# EAGLE board PRA_30_5_23@2 (EAGLE 6.3)
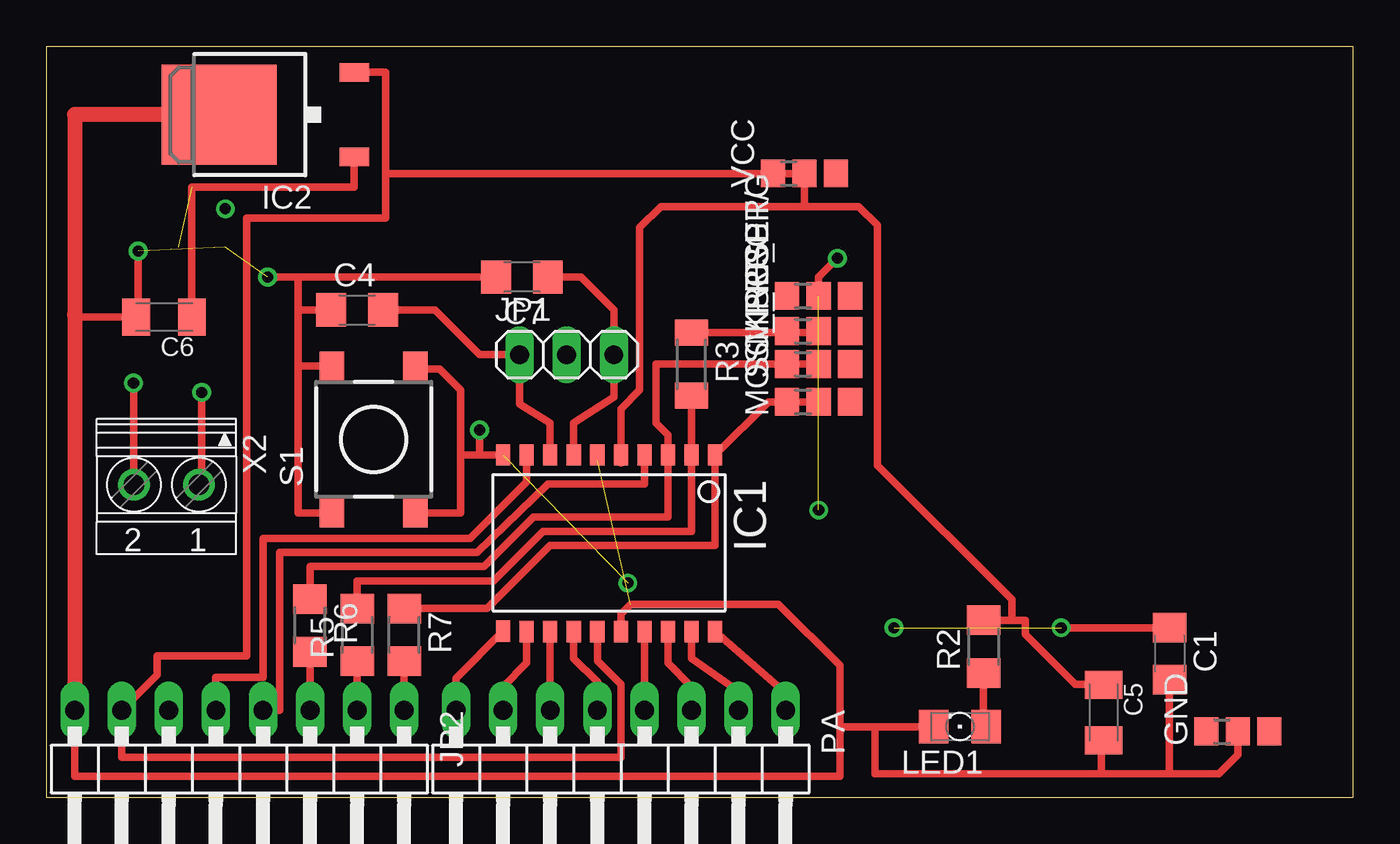
[diagram p0: board, top side]
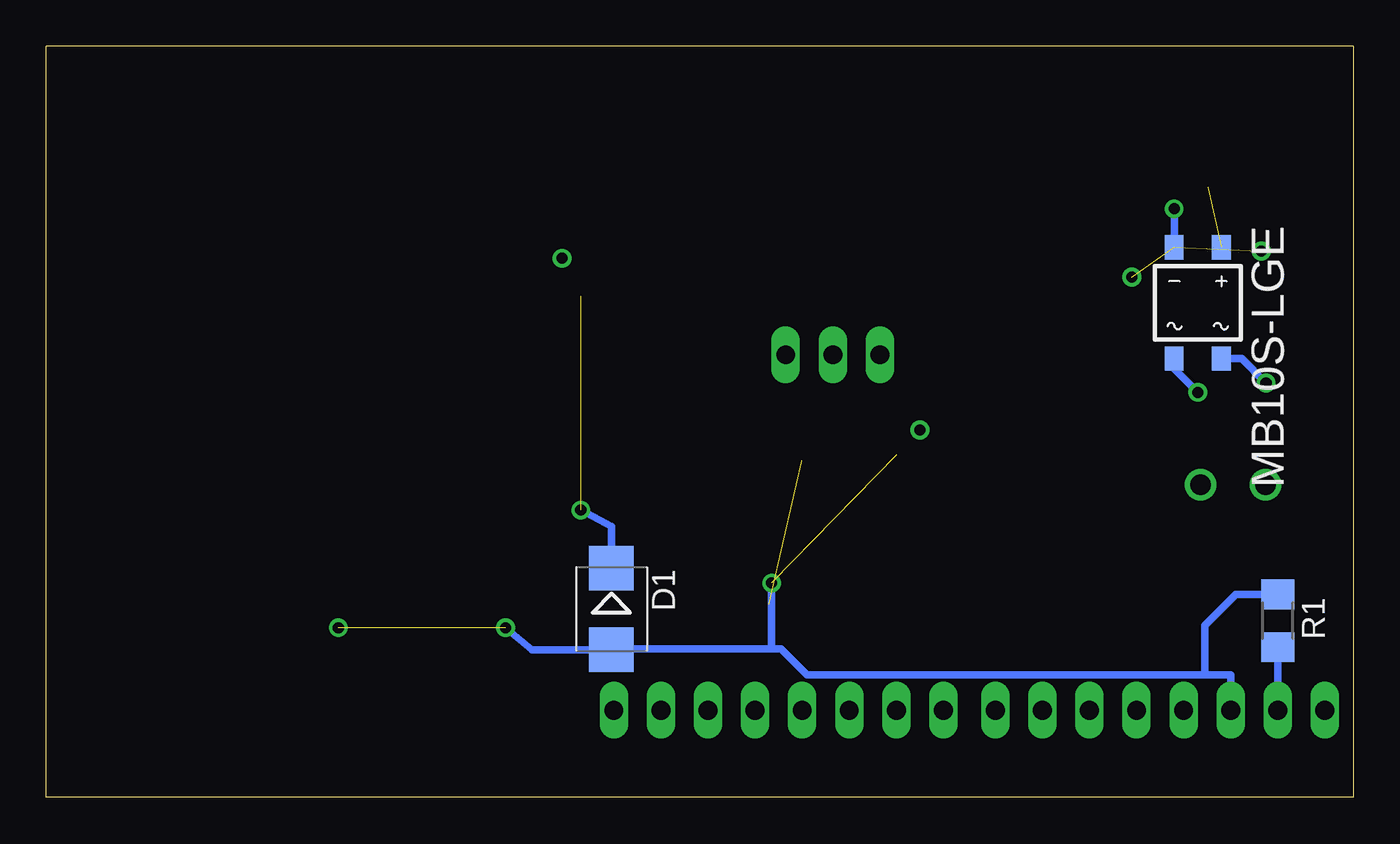
[diagram p1: board, bottom side, seen from below]

Size 70.48 x 40.51 mm. Coordinates in mm from the lower left corner, seen from the top.
Outline: 0,0 70.48,0 70.48,40.51 0,40.51 0,0
Copper layers (1*16): Top 0.035mm / dielectric 1.5mm / Bottom 0.035mm
Design rules "default": minimum track width 10mil, minimum drill 24mil, track to track 8mil, track to pad 8mil, pad to pad 8mil, via to via 8mil, smd to smd 8mil, copper to edge 40mil, drill to drill 8mil, minimum pad ring 10mil, minimum via ring 8mil, stop-mask expansion 4mil, vias tented up to drill 0mil, thermal gap 10mil

## Footprints (pad centres in the part's own frame; a part is rotated, then mirrored left to right if it is on the bottom)
C1206 = smd 1.6 x 1.8: 1 -1.4,0; 2 1.4,0
C1206K = smd 1.5 x 2: 1 -1.5,0; 2 1.5,0
SMB = smd 2.4 x 2.4: A 2.2,0; C -2.2,0
A0R-JMP = smd 1.5 x 1.3: 1 0,1.7; 2 0,0; 3 0,-1.7
SO20L = smd 0.762 x 1.143: 1 -5.08,-5.131; 2 -3.81,-5.131; 3 -2.54,-5.131; 4 -1.27,-5.131; 5 0,-5.131; 6 1.27,-5.131; 7 2.54,-5.131; 8 3.81,-5.131; 9 5.08,-5.131; 10 6.35,-5.131; 11 6.35,4.369; 12 5.08,4.394; 13 3.81,4.394; 14 2.54,4.394; 15 1.27,4.394; 16 0,4.394; 17 -1.27,4.394; 18 -2.54,4.394; 19 -3.81,4.394; 20 -5.08,4.394
TO252 = smd 1 x 1.6: 1 -2.28,-4.8; 2 2.28,-4.8 | smd 5.4 x 6.2: 3 0,2.5
1X03 = drill 1.016 long: 1 -2.54,0; 2 0,0; 3 2.54,0
1X08/90 = drill 1.016 long: 1 -8.89,-3.81; 2 -6.35,-3.81; 3 -3.81,-3.81; 4 -1.27,-3.81; 5 1.27,-3.81; 6 3.81,-3.81; 7 6.35,-3.81; 8 8.89,-3.81
1206 = smd 1.6 x 1.803: A -1.422,0; C 1.422,0
MBS = smd 1 x 1.3: + -1.27,-3; - 1.27,-3; AC1 -1.27,3; AC2 1.27,3
R1206 = smd 1.6 x 1.803: 1 -1.422,0; 2 1.422,0
M1406 = smd 1.4 x 1.8: 1 -1.7,0; 2 1.7,0
DTSM-6 = smd 1.55 x 1.3: 1 -3.975,2.25; 2 3.975,2.25; 3 -3.975,-2.25; 4 3.975,-2.25
1751248 = drill 1.1 pad 1.7: 1 -1.75,-0.1; 2 1.75,-0.1

## Placement (x,y rotation side)
C1  100n  [C1206]  60.58,7.75 270 top
C4  33p  [C1206]  16.76,26.29 0 top
C5  10uTantal  [C1206K]  57.02,4.57 270 top
C6  10u/20VTantal  [C1206K]  6.35,25.91 180 top
C7  33p  [C1206]  25.65,28.07 180 top
D1  4148  [SMB]  40.01,10.16 270 bottom
GND  0R-JUMPA  [A0R-JMP]  64.26,3.56 90 top
IC1  TINY26LS  [SO20L]  30.99,13.34 180 top
IC2  LM2936DT-5.0  [TO252]  11.81,36.83 90 top
JP1  [1X03]  28.07,23.88 0 top
JP2  [1X08/90]  10.41,0.89 180 top
LED1  [1206]  49.28,3.81 180 top
MB10S-LGE  B10S  [MBS]  8.38,26.67 180 bottom
MISO_PRG  0R-JUMPA  [A0R-JMP]  41.66,25.15 90 top
MOSI_PRG  0R-JUMPA  [A0R-JMP]  41.66,21.34 90 top
PA  [1X08/90]  30.99,0.89 180 top
R1  10k  [R1206]  4.06,9.53 270 bottom
R2  1k  [R1206]  50.55,8.13 90 top
R3  0R  [M1406]  34.8,23.37 270 top
R5  4k7  [R1206]  16.76,8.76 90 top
R6  4k7  [R1206]  14.22,9.27 270 top
R7  4k7  [R1206]  19.3,8.76 270 top
RESET/  0R-JUMPA  [A0R-JMP]  41.66,27.05 90 top
S1  DTSM-6  [DTSM-6]  17.65,19.3 90 top
SCK_PRG  0R-JUMPA  [A0R-JMP]  41.66,23.37 90 top
VCC  0R-JUMPA  [A0R-JMP]  40.89,33.66 90 top
X2  1751248  [1751248]  6.48,16.76 180 top

## Library data of the parts
C1 C4-C7 R1-R3 R5-R7 = rcl
D1 = diode
GND MISO_PRG MOSI_PRG RESET/ SCK_PRG VCC = jump-0r-smd
IC1 = atmel; MPN: ATTINY26L-8SU; OC_FARNELL: 9171665; OC_NEWARK: 01M6921
IC2 = national-semiconductor; MF: NATIONAL SEMICONDUCTOR; MPN: LM2936DT-5.0/NOPB; OC_FARNELL: 1286864; OC_NEWARK: 41K4501
JP1 JP2 PA = pinhead
LED1 = led
MB10S-LGE = rectifier
S1 = switch-tact
X2 = con-phoenix-350; OC_FARNELL: unknown; OC_NEWARK: unknown

## Nets
GND: C1.2 C4.1 C5.2 C6.2 C7.2 GND.2 IC1.6 IC1.16 IC2.3 JP2.8 LED1.C MB10S-LGE.- S1.1 S1.2
MISO: JP2.2 R5.1
MISO_JUMP_RES: MISO_PRG.2 R3.1
MISO_PRG: IC1.2 R3.2 R5.2
MOSI: JP2.1 R7.2
MOSI_PRG: IC1.1 MOSI_PRG.2 R7.1
N$15: C4.2 IC1.8 JP1.1
N$16: C7.1 IC1.7 JP1.3
N$17: MB10S-LGE.AC2 X2.1
N$29: MB10S-LGE.AC1 X2.2
N$30: LED1.A R2.1
PA0: IC1.20 PA.1
PA1: IC1.19 PA.2
PA2: IC1.18 PA.3
PA3: IC1.17 PA.4
PA4: IC1.14 PA.5
PA5: IC1.13 PA.6
PA6: IC1.12 PA.7
PA7: IC1.11 PA.8
PB3: IC1.4 JP2.4
PB6: IC1.9 JP2.5
PB7: C1.1 D1.A IC1.10 JP2.6 R1.1 S1.3 S1.4
RESET: D1.C RESET/.2
SCK: JP2.3 R6.2
SCK_PRG: IC1.3 R6.1 SCK_PRG.2
VCC: C5.1 IC1.5 IC1.15 IC2.2 JP2.7 R1.2 R2.2 VCC.2
VIN_PLUS: C6.1 IC2.1 MB10S-LGE.+

## Tracks (layer width: path | path; a pad name or v marks a point on that pad's centre or on a via)
GND  (via drill 0.6)  (3 unrouted)
  Top 0.254: IC1.6 29.72,18.16
  Top 0.406: 1.52,26.04 1.52,25.91 C6.2 4.95,25.91 v4.95,29.46 | IC1.16 30.99,9.91 31.5,10.41 39.5,10.41 42.8,7.11 42.8,3.81 | JP2.8 1.52,1.14 42.8,1.14 42.8,3.81 | 44.7,3.81 42.8,3.81 | S1.1 13.59,15.33 13.59,23.28 | 13.59,23.28 13.59,26.29 | 13.59,26.29 13.59,28.07 | S1.2 13.59,23.28 | LED1.C 44.7,3.81 | 44.7,3.81 44.7,1.27 56.9,1.27 | C4.1 13.59,26.29 | C7.2 13.59,28.07 | 13.59,28.07 v11.94,28.07 | GND.2 64.26,2.29 63.25,1.27 60.58,1.27 | C5.2 56.9,3.07 56.9,1.27 | 56.9,1.27 60.58,1.27 | C1.2 60.58,1.27
  Top 0.813: IC2.3 1.52,36.83 1.52,26.04 JP2.8
  Bottom 0.406: MB10S-LGE.- v9.65,31.75
MISO
  Top 0.406: R5.1 JP2.2
MISO_JUMP_RES
  Top 0.406: R3.1 41.66,25.07 MISO_PRG.2
MISO_PRG
  Top 0.406: R3.2 IC1.2 34.8,14.35 26.8,14.35 24.13,11.68 16.76,11.68 R5.2
MOSI
  Top 0.406: R7.2 JP2.1
MOSI_PRG
  Top 0.406: MOSI_PRG.2 38.94,21.34 IC1.1 36.07,13.59 27.18,13.59 23.77,10.19 R7.1
N$15
  Top 0.406: IC1.8 27.18,20.19 25.53,21.21 JP1.1 23.37,23.88 20.95,26.29 C4.2
N$16
  Top 0.406: IC1.7 28.45,20.19 30.61,21.59 JP1.3 30.61,26.29 28.83,28.07 C7.1
N$17  (via drill 0.6)
  Top 0.406: X2.1 8.38,16.86 v8.38,21.84
  Bottom 0.406: MB10S-LGE.AC2 9.65,23.11 v8.38,21.84
N$29  (via drill 0.6)
  Top 0.406: X2.2 4.7,16.86 v4.7,22.35
  Bottom 0.406: MB10S-LGE.AC1 6.02,23.67 v4.7,22.35
N$30
  Top 0.406: LED1.A 50.55,3.81 R2.1
PA0
  Top 0.406: PA.1 39.88,5.64 IC1.20
PA1
  Top 0.406: PA.2 37.34,5.71 34.8,7.49 IC1.19
PA2
  Top 0.406: PA.3 34.8,5.97 33.53,7.24 IC1.18
PA3
  Top 0.406: PA.4 IC1.17
PA4
  Top 0.406: PA.5 29.72,6.22 28.45,7.49 IC1.14
PA5
  Top 0.406: PA.6 IC1.13
PA6
  Top 0.406: PA.7 24.64,5.97 25.91,7.24 IC1.12
PA7
  Top 0.406: PA.8 22.1,6.43 IC1.11
PB3
  Top 0.406: JP2.4 12.57,4.7 12.57,13.21 23.24,13.21 27.05,16.89 32.26,16.89 IC1.4
PB6
  Top 0.406: IC1.9 25.91,17.02 22.86,13.97 11.68,13.97 11.68,6.48 9.14,6.48 JP2.5
PB7  (via drill 0.6)  (2 unrouted)
  Top 0.406: C1.1 v54.74,9.15 v54.74,9.14 | S1.3 22.35,15.33 22.35,18.54 | 22.35,18.54 22.35,21.97 21.21,23.11 20.07,23.11 S1.4 | 22.35,18.54 22.43,18.47 IC1.10 23.37,18.47 v23.37,19.81
  Bottom 0.406: JP2.6 6.6,6.6 7.87,6.6 | 7.87,6.6 29.46,6.6 30.86,8 31.37,8 | 31.37,8 39.96,8 D1.A 44.28,7.96 v45.72,9.14 | R1.1 6.33,10.95 8,9.27 8,6.73 7.87,6.6 | 31.37,8 v31.37,11.56
RESET  (via drill 0.6)  (1 unrouted)
  Top 0.406: RESET/.2 41.66,28.07 v42.67,29.08
  Bottom 0.406: D1.C 40.01,14.61 v41.66,15.49
SCK
  Top 0.406: JP2.3 R6.2
SCK_PRG
  Top 0.406: SCK_PRG.2 32.89,23.37 32.89,20.19 33.53,19.56 IC1.3 33.53,15.11 26.29,15.11 23.62,12.45 14.22,12.45 R6.1
VCC
  Top 0.254: IC1.5 30.99,18.03
  Top 0.406: IC1.15 29.72,7.37 30.99,6.1 30.99,2.16 4.06,2.16 JP2.7 5.97,6.6 5.97,7.62 10.79,7.62 10.79,31.24 18.29,31.24 18.29,33.66 | 18.29,39.11 18.29,33.66 | 30.99,18.03 30.99,20.95 32,21.97 32,30.73 33.15,31.88 40.89,31.88 | IC2.2 18.29,39.11 | 18.29,39.12 18.29,39.11 | 18.29,33.66 VCC.2 40.89,31.88 | 40.89,31.88 43.81,31.88 44.83,30.86 44.83,17.91 52.07,10.67 52.07,9.55 | R2.2 52.07,9.55 | 52.07,9.55 52.81,9.55 52.81,8.79 55.5,6.1 57,6.1 C5.1
  Bottom 0.406: R1.2 JP2.7
VIN_PLUS  (1 unrouted)
  Top 0.406: IC2.1 16.61,32.92 7.85,32.92 C6.1